# EAGLE board PCB PUMP LED SENSOR (EAGLE 9.5.1)
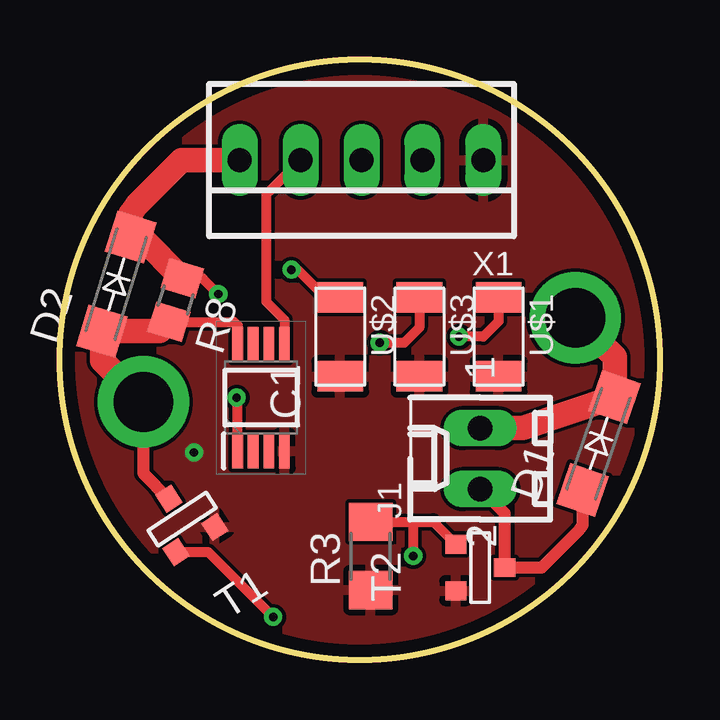
[diagram p0: board, top side]
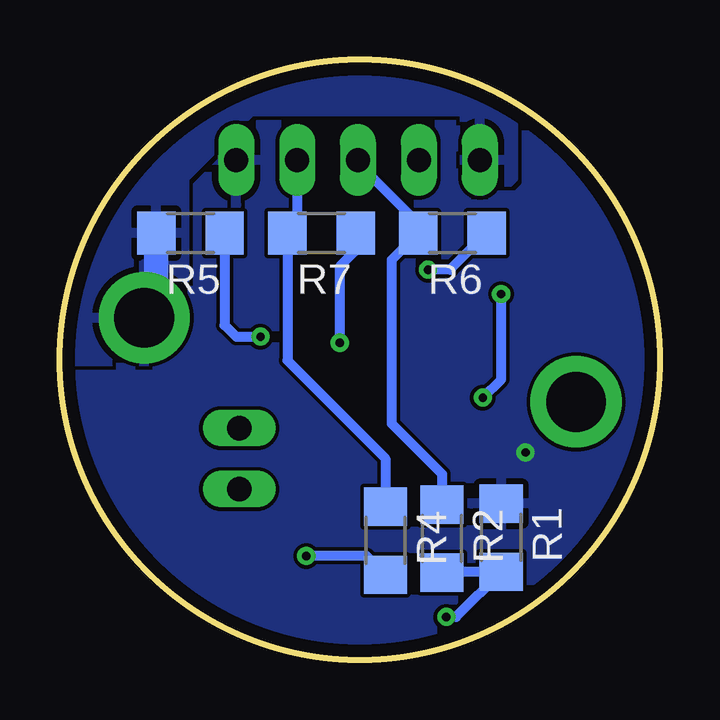
[diagram p1: board, bottom side, seen from below]

Size 25 x 25 mm. Coordinates in mm from the lower left corner, seen from the top.
Outline: circle at 12.5,12.5 radius 12.5
Copper layers (1*16): Top 0.035mm / dielectric 1.5mm / Bottom 0.035mm
Design rules "default *": minimum track width 6mil, minimum drill 0.35mm, track to track 6mil, track to pad 6mil, pad to pad 6mil, via to via 6mil, smd to smd 6mil, copper to edge 20mil, drill to drill 6mil, minimum pad ring 10mil, minimum via ring 8mil, stop-mask expansion 4mil, vias tented up to drill 0mil, thermal gap 10mil

## Footprints (pad centres in the part's own frame; a part is rotated, then mirrored left to right if it is on the bottom)
SMA-DO214AC = smd 1.8 x 1.7: A -2.05,0; K 2.05,0
SOP65P490X110-8N = smd 1.45 x 0.45: 1 -2.225,0.975; 2 -2.225,0.325; 3 -2.225,-0.325; 4 -2.225,-0.975; 5 2.225,-0.975; 6 2.225,-0.325; 7 2.225,0.325; 8 2.225,0.975
6410-02 = drill 1.016 long: 1 1.27,0; 2 -1.27,0
PWRPAD_2-5MM = drill 2.489 pad 3.81: P$1 0,0
R1206 = smd 1.6 x 1.803: 1 -1.422,0; 2 1.422,0
R0805 = smd 1.3 x 1.5: 1 -0.95,0; 2 0.95,0
SOT-23 = smd 0.787 x 0.889: 1 0.025,-1.016; 2 -0.94,1.016; 3 0.991,1.016
LED1206FAB = smd 1.27 x 1.905: 1 -1.651,0; 2 1.651,0
22-23-2051 = drill 1 long: 1 -5.08,0; 2 -2.54,0; 3 0,0; 4 2.54,0; 5 5.08,0

## Placement (x,y rotation side)
D1  GF1  [SMA-DO214AC]  22.46,9 71 top
D2  GF1  [SMA-DO214AC]  2.35,15.65 73 top
IC1  AD8217BRMZ  [SOP65P490X110-8N]  8.38,10.92 90 top
J1  22-27-2021-02  [6410-02]  17.53,8.38 90 top
J3  PWRPAD2-5MM  [PWRPAD_2-5MM]  3.48,10.74 0 top
J4  PWRPAD2-5MM  [PWRPAD_2-5MM]  21.49,14.25 0 top
R1  10k  [R1206]  6.6,5.08 270 bottom
R2  1K  [R1206]  9.07,5.04 270 bottom
R3  10k  [R1206]  12.95,4.32 90 top
R4  1K  [R1206]  11.43,4.95 270 bottom
R5  1K  [R1206]  19.56,17.78 180 bottom
R6  1K  [R1206]  8.64,17.78 180 bottom
R7  1K  [R1206]  14.1,17.78 180 bottom
R8  [R0805]  4.83,14.99 253 top
T1  [SOT-23]  5.12,5.87 213 top
T2  [SOT-23]  17.53,3.81 90 top
U$1  LEDFAB1206  [LED1206FAB]  18.29,13.46 270 top
U$2  LEDFAB1206  [LED1206FAB]  11.68,13.46 270 top
U$3  LEDFAB1206  [LED1206FAB]  14.99,13.46 270 top
X1  22-23-2051  [22-23-2051]  12.57,20.83 180 top

## Library data of the parts
D1 D2 = diode
IC1 = AD8217BRMZ; DESCRIPTION: Analog Devices AD8217BRMZ Current Loop Transmitter 80V 8-Pin MSOP; HEIGHT: 1.1mm; MANUFACTURER_NAME: Analog Devices; MANUFACTURER_PART_NUMBER: AD8217BRMZ; MOUSER_PART_NUMBER: 584-AD8217BRMZ; MOUSER_PRICE-STOCK: https://www.mouser.com/Search/Refine.aspx?Keyword=584-AD8217BRMZ
J1 = con-molex; MF: MOLEX; OC_FARNELL: unknown; OC_NEWARK: unknown
J3 J4 T1 T2 U$1-U$3 = fab
R1-R8 = rcl; SPICEPREFIX: R
X1 = con-molex; MF: MOLEX; MPN: 22-23-2051; OC_FARNELL: 1462952; OC_NEWARK: 38C9178

## Nets
+5V: D1.K D2.K IC1.1 J1.1 J4.P$1 R5.2 R8.1 X1.5
EV: R4.1 R7.2 X1.2
GND: IC1.4 R1.1 R3.1 T1.2 T2.2 U$1.2 U$2.2 U$3.2 X1.1
MOTOR-: D2.A IC1.8 J3.P$1 R8.2 T1.1
N$1: D1.A J1.2 T2.1
N$3: R1.2 R2.2 T1.3
N$4: R3.2 R4.2 T2.3
N$5: R5.1 U$1.1
N$6: R6.1 U$2.1
N$7: R7.1 U$3.1
OUT_SENSOR: IC1.5 X1.4
PUMP: R2.1 R6.2 X1.3

## Tracks (layer width: path | path; a pad name or v marks a point on that pad's centre or on a via)
+5V  (via drill 0.35)
  Top 0.406: IC1.1 7.41,10.88 v7.37,10.92 | v6.6,15.24 5.95,15.89 R8.1
  Top 1.016: X1.5 5.08,20.83 3.21,18.96 2.95,18.59 D2.K 3.38,17.61 R8.1 | J4.P$1 23.13,12.61 D1.K 19.3,9.65 J1.1
  Bottom 0.406: v7.37,10.92 6.6,11.68 v6.6,15.24
  Bottom 1.016: J4.P$1 20.98,14.76 R5.2
  pour Bottom: 19.81,13.46 19.81,20.07 17.02,22.86 8.13,22.86 8.13,19.81 7.87,19.56 6.6,19.56 6.1,20.07 6.1,22.86 8.13,24.89 19.05,24.89 25.4,18.54 25.4,13.46 24.38,12.45 20.83,12.45
EV
  Bottom 0.406: X1.2 15.11,18.19 R7.2 15.52,12.47 11.43,8.38 R4.1
GND  (via drill 0.35)
  other vias: 5.59,8.64
  pour Bottom (rank 2): -1.02,15.24 4.57,24.64 12.19,25.65 21.34,23.88 25.15,16 25.65,8.64 21.84,3.05 16.26,-0.25 7.87,-0.51 2.54,3.56 -0.76,10.41
  pour Top (rank 2): 0,9.14 -0.76,15.75 3.05,21.59 8.38,25.4 16,25.15 22.35,21.84 25.15,15.49 25.65,10.67 23.11,5.08 19.81,1.27 13.46,-0.25 7.11,-0.25 2.54,3.56
MOTOR-
  Top 0.406: R8.2 7.26,14.08 7.41,13.93 IC1.8
  Top 0.508: T1.1 3.48,7.77 J3.P$1
  Top 1.016: R8.2 4.17,13.69 D2.A 1.75,12.47 J3.P$1
N$1
  Top 0.508: D1.A 21.79,5.61 21.63,5.38 20.09,3.83 T2.1 18.54,6.1 J1.2
N$3  (via drill 0.35)
  Top 0.406: v8.89,1.78 6.19,4.48 T1.3
  Bottom 0.406: R2.2 9.03,3.66 R1.2 8.48,1.78 v8.89,1.78
N$4  (via drill 0.35)
  Top 0.406: R3.2 14.73,5.74 | 14.73,5.74 15.57,5.74 T2.3 | v14.73,4.32 14.73,5.74
  Bottom 0.406: R4.2 12.22,4.32 v14.73,4.32
N$5  (via drill 0.35)
  Top 0.406: U$1.1 18.29,14.1 17.65,13.46 v16.64,13.46
  Bottom 0.406: R5.1 18.14,13.95 17.65,13.46 v16.64,13.46
N$6  (via drill 0.35)
  Top 0.406: v9.65,16.26 9.91,16.26 11.05,15.11 U$2.1
  Bottom 0.406: R6.1 8.74,16.26 v9.65,16.26
N$7  (via drill 0.35)
  Top 0.406: U$3.1 14.99,13.84 14.35,13.21 v13.34,13.21
  Bottom 0.406: R7.1 12.68,17.04 13.34,16.38 v13.34,13.21
OUT_SENSOR
  Top 0.406: X1.4 8.6,19.39 8.6,14.93 9.36,14.16 IC1.5
PUMP
  Bottom 0.406: X1.3 12.57,20.7 10.06,18.19 R6.2 11.18,16.66 11.18,9.84 9.07,7.73 R2.1